# Altium PCB Analog_mic_breakout.PcbDoc
Units mm, origin at the board's own origin, x right, y up, seen from the top; angles counter-clockwise.
Board outline 4.11 x 9 mm, 2 copper layers (Top Layer, Bottom Layer), stack 0.324 mm thick; 6 components, 4 nets, 15 pads, 0 vias.
Unrouted connection lines stored in the file: 1.
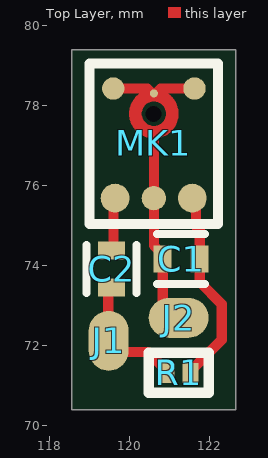
[diagram p0: Top Layer view]
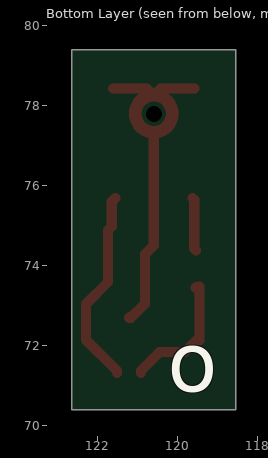
[diagram p1: Bottom Layer view, seen from below]
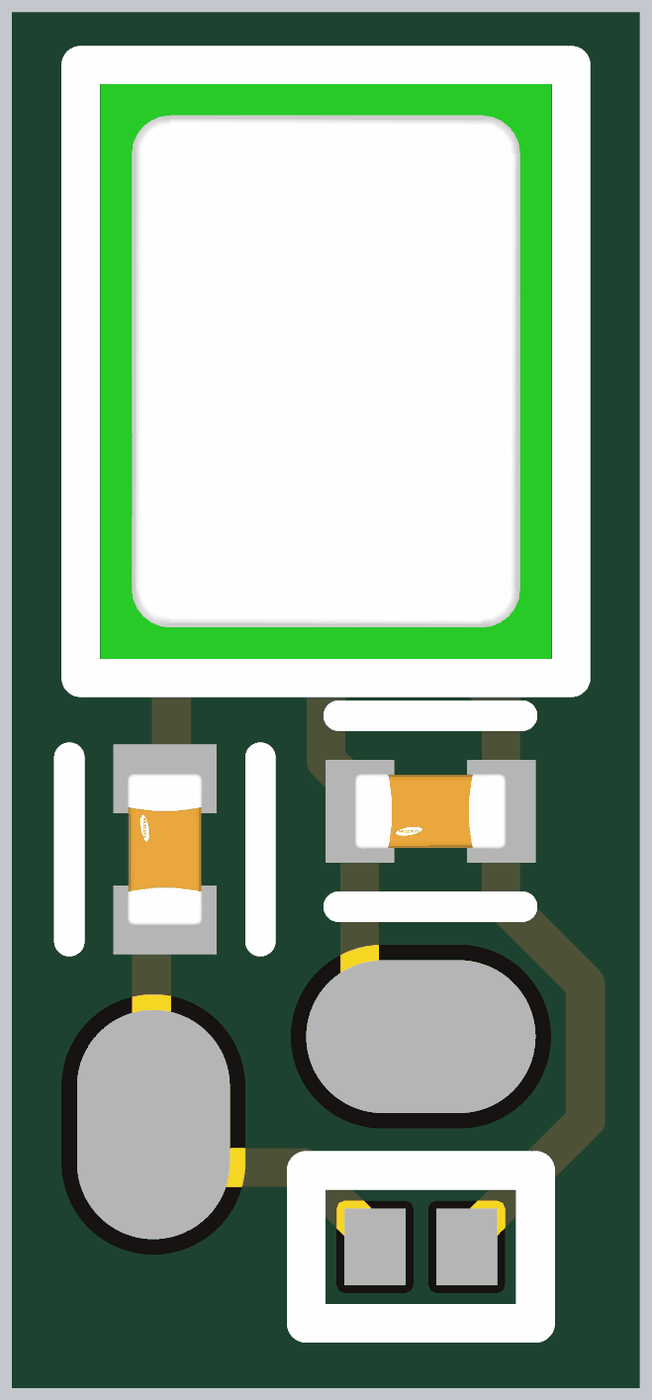
[diagram p2: 3D render of the assembled board from above, using the file's embedded part models]

## Layer stack, top to bottom
Top Solder: solder mask 0.0254, SM-001, Dk 4
Top Layer: signal copper 0.035
Dielectric 1: core 0.254, Core-028, Dk 4.3
Bottom Layer: signal copper 0.035
Bottom Solder: solder mask 0.0254, SM-001, Dk 4

## Board outline
118.55,70.4 118.55,79.402 122.655,79.402 122.655,70.4

## Design rules (kind name [scope] priority, off if disabled: settings)
Clearance [All] p1: gap=0.2 ignorepadtopadclearanceinfootprint=TRUE except(0: Arc-Hole Track-Hole SMDPad-Hole THPad-Hole Via-Hole Fill-Hole Poly-Hole Region-Hole Text-Hole)
MinimumSolderMaskSliver [All] p1: minsoldermaskwidth=0.05
PolygonConnect [All] p1: connectstyle=Relief reliefconductorwidth=0.254 reliefentries=4 polygonreliefangle="90 Angle" airgapwidth=0.254
RoutingVias [All] p1: holewidth=0.711 width=1.27 viastyle="Through Hole" minholewidth=0.711 minwidth=1.27 maxholewidth=0.711 maxwidth=1.27
SilkToSolderMaskClearance [IsPad] p1: minsilkscreentomaskgap=0.02 clearancetoexposedcopper=FALSE
SolderMaskExpansion [All] p1: expansion=0.102 istentingtop=FALSE
UnRoutedNet [All] p1: checkbadconnections=TRUE
Width [All] p1: maxlimit=1 minlimit=0.254 preferedwidth=0.254
27 further rules are at their usual default settings.

## Components (designator, comment, footprint, x,y, rotation, side; value= is the part's Value field where it differs from the comment)
C1 "CL05A106MP5NUNC" FP-CL05A106MP5NUNC-MFG 121.288,74.175 r180 top value=10uF
C2 "CL05A106MP5NUNC" FP-CL05A106MP5NUNC-MFG 119.55,73.925 r90 top value=10uF
J1 "Pad" Pad 119.475,72.125 r0 top
J2 "Pad" Pad 121.225,72.7 r270 top
MK1 "AMM-3738-B-R" 665-AMM-3738-B-R 120.604,77.802 r0 top
R1 "ERA-1AEB102C" 0603_SMD_Resistor 121.225,71.325 r0 top

## Footprints (in the part's own frame and the unit in brackets; to place one, negate y for a bottom-side part, rotate by r counter-clockwise, add the part's x,y. Pads: shape width x height; smd on the part's side, far side on the other; paste and mask are expansions set on the pad)
0603_SMD_Resistor [mm]
  rect 0.4x0.5 smd mask+0.052: 1(-0.3,0) 2(0.3,0)
  silkscreen extent -0.75,-0.5 0.75,0.5, body extent -0.34,-0.17 0.34,0.17, height 0.32
665-AMM-3738-B-R [mm] "Analog MEMS Microphone"
  round 0.72 smd: 1(-0.97,-2.11) 4(0.96,-2.11)
  round 0.56 smd: 2(-1.015,0.63)
  round 0.56 smd mask+0.102: 3(1.015,0.63)
  round 0.61 smd: 5(0,-2.11)
  round 0.2 smd: 6(0,0.508)
  Top Layer circle w0.315: c0,0 r0.463
  silkscreen extent -1.61,-2.76 1.61,1.25, body extent -1.48,-2.63 1.47,1.13, height 1.11
FP-CL05A106MP5NUNC-MFG [mm]
  rect 0.45x0.675 smd paste+0 mask+0: 1(-0.463,0) 2(0.463,0)
  silkscreen extent -0.6,-0.63 0.6,0.63, body extent -0.79,-0.45 0.79,0.45, height 0.25
Pad [mm]
  oval 1x1.5 smd: 1(0,0)

## Part data
C1 C2: library part CMP-13271-000002-1, "CAP CER 10UF 10V X5R 0402", Capacitance=10uF, Manufacturer=Samsung, Temperature="-55°C to +85°C", Temperature Characteristic=X5R, Temperature Coefficient=15%, Temperature Range High=+85°C, Temperature Range Low=-55°C, Tolerance=20%, Voltage Rating=10V, Automotive=No, Category=Cap, ComponentLink2Description=Datasheet, ComponentLink2URL=http://www.samsungsem.com/kr/support/product-search/mlcc/__icsFiles/afieldfile/2019/05/10/19-CL05A106MP5NUNC.pdf, Device Class L1="Passive Components", Device Class L2=Capacitors, Device Class L3="Ceramic Capacitors", Digikey Description="CAP CER 10UF 10V X5R 0402", Height=0.7mm, Ipc Land Pattern Name=CAPC10050X50, Lead Free=Yes, Manufacturer Part Number=CL05A106MP5NUNC, Material=Ceramic, Octopart=https://octopart.com/cl05a106mp5nunc-samsung-22457395, Package=CL05A106MP5NUNC, RoHS=TRUE
MK1: Manufacturer="PUI Audio", Supplier Part Number 1=665-AMM-3738-B-R, Supplier 1=Mouser
R1: "0603 SMD 1K Res 0.1%", Supplier Part Number 1=P1.0KBXCT-ND, Supplier 1=Digi-Key

## Free pads (board coordinates)
  round 0.1 hole 0.4 unplated: 13(120.6,77.8)

## Nets (pads, with @x,y where several pads share a name; then routed paths per layer and width w, separated by ;. In a path a pad name is that pad's centre, name@x,y a point inside that pad or via, vN(x,y) a via of type N, cw(c..) or ccw(c..) an arc to the next point about the centre after c; other vN are vias at no path point)
GND: C1.2 J2.1 MK1.2 MK1.3 MK1.5 MK1.6 pad.13 | length 7.1
  Top Layer w0.254: MK1.2 120.437,78.432 MK1.6@120.604,78.265 ; 120.604,77.339 MK1.5 120.604,74.508 120.825,74.287 C1.2 120.825,73.052 121.177,72.7 J2.1 ; MK1.6 MK1.6@120.604,78.265 ; MK1.3 120.771,78.432 MK1.6@120.604,78.265
NetC1_1: C1.1 MK1.4 R1.2 | length 5
  Top Layer w0.254: R1.2 121.525,71.375 122.302,72.152 122.302,73.043 121.75,73.595 C1.1 121.75,74.894 121.653,74.99 121.653,75.603 MK1.4
NetC2_1: C2.1 J1.1 R1.1 | length 3.1
  Top Layer w0.254: J1.1@119.463,72.138 C2.1@119.463,73.475 ; C2.1 C2.1@119.563,73.45 ; J1.1@119.563,72.112 119.575,72.1 119.831,71.844 120.456,71.844 120.925,71.375 R1.1
NetC2_2: C2.2 MK1.1 | length 1.3
  Top Layer w0.254: C2.2 119.592,74.43 119.592,75.65 MK1.1

## Silkscreen, mask and mechanical layers (free items; w line width, h text height)
Bottom Overlay:
  text "o" at 119,70.85 h1.5
Mechanical 1:
  the board outline again, w0.254